# EAGLE board GarageDigitalClockDisplay (EAGLE 9.6.2)
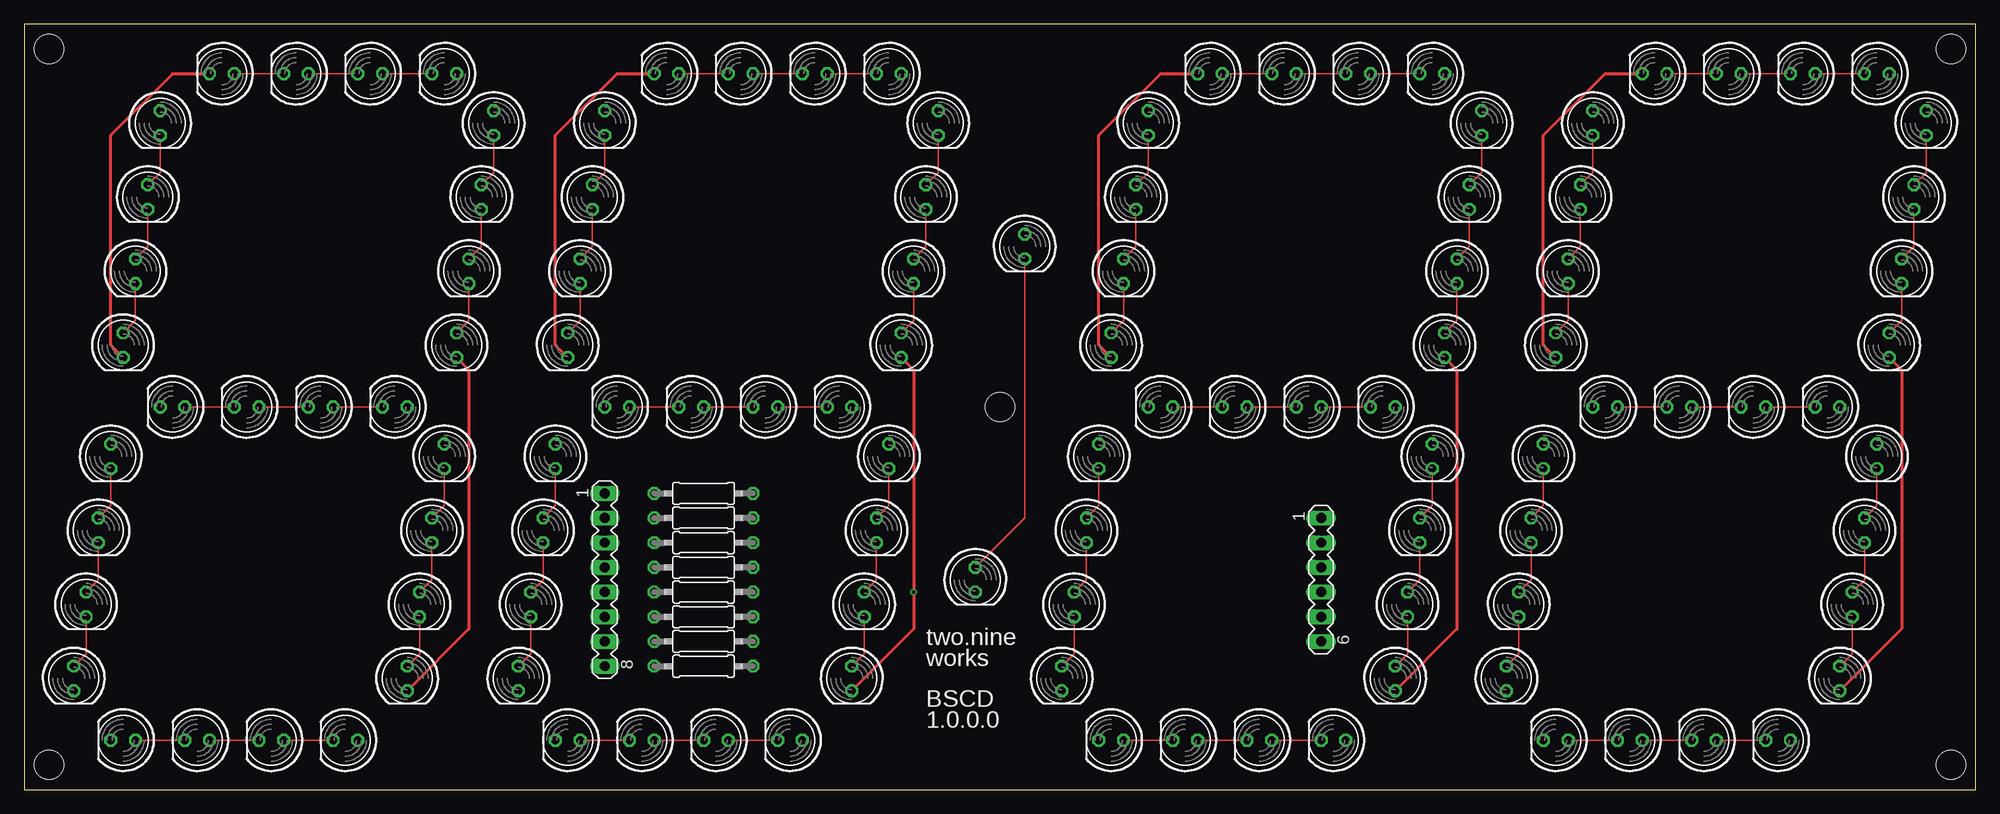
[diagram p0: board, top side]
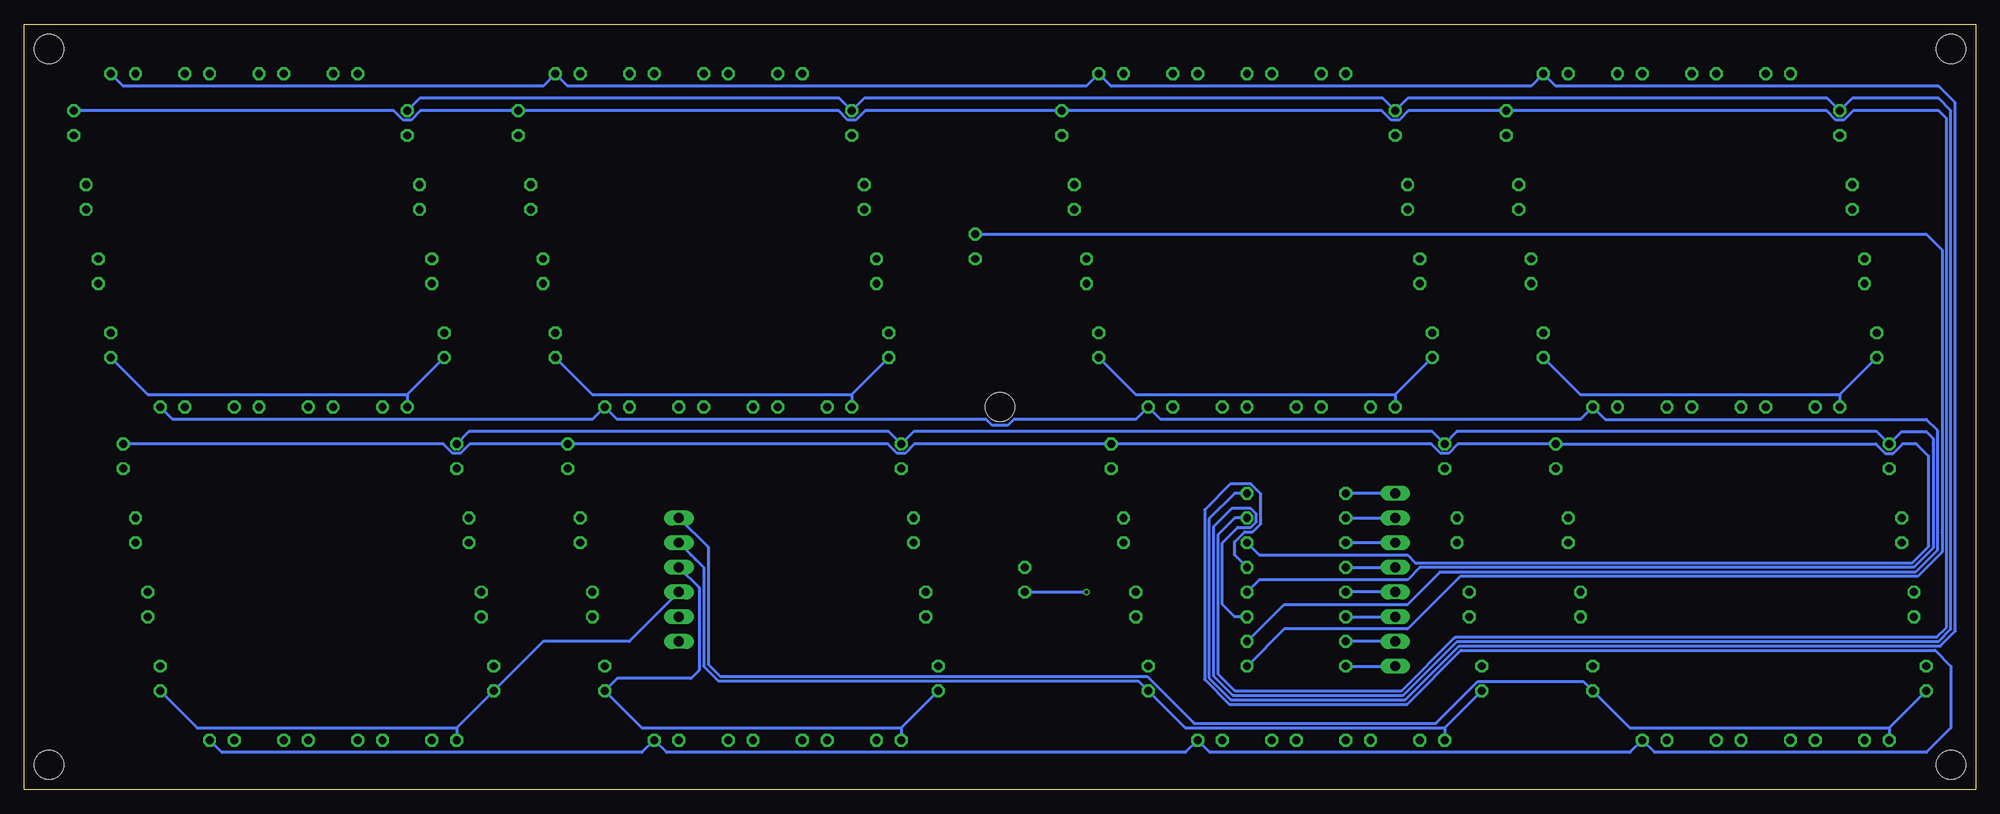
[diagram p1: board, bottom side, seen from below]

Size 200.66 x 78.74 mm. Coordinates in mm from the lower left corner, seen from the top.
Outline: 0,0 200.66,0 200.66,78.74 0,78.74 0,0
Copper layers (1*16): Top 0.035mm / dielectric 1.5mm / Bottom 0.035mm
Design rules "SeeedStudio_2layer_DRU_no_angle_20140221": minimum track width 6mil, minimum drill 12mil, track to track 6mil, track to pad 6mil, pad to pad 6mil, via to via 6mil, smd to smd 0mil, copper to edge 10mil, drill to drill 10mil, minimum pad ring 10mil, minimum via ring 6mil, stop-mask expansion 2mil, vias tented up to drill 100mil, thermal gap 10mil
Holes 3 mm at 2.54,76.2 2.54,2.54 198.12,76.2 198.12,2.54 100.33,39.37

## Footprints (pad centres in the part's own frame; a part is rotated, then mirrored left to right if it is on the bottom)
LED5MM = drill 0.813 octagon: A -1.27,0; K 1.27,0
0207/10 = drill 0.813 octagon: 1 -5.08,0; 2 5.08,0
MA08-1 = drill 1.016 long: 1 -8.89,0; 2 -6.35,0; 3 -3.81,0; 4 -1.27,0; 5 1.27,0; 6 3.81,0; 7 6.35,0; 8 8.89,0
MA06-1 = drill 1.016 long: 1 -6.35,0; 2 -3.81,0; 3 -1.27,0; 4 1.27,0; 5 3.81,0; 6 6.35,0

## Placement (x,y rotation side)
LED1  [LED5MM]  13.97,68.58 270 top
LED2  [LED5MM]  12.7,60.96 270 top
LED3  [LED5MM]  11.43,53.34 270 top
LED4  [LED5MM]  10.16,45.72 270 top
LED5  [LED5MM]  8.89,34.29 270 top
LED6  [LED5MM]  7.62,26.67 270 top
LED7  [LED5MM]  6.35,19.05 270 top
LED8  [LED5MM]  5.08,11.43 270 top
LED9  [LED5MM]  20.32,73.66 180 top
LED10  [LED5MM]  27.94,73.66 180 top
LED11  [LED5MM]  35.56,73.66 180 top
LED12  [LED5MM]  43.18,73.66 180 top
LED13  [LED5MM]  15.24,39.37 180 top
LED14  [LED5MM]  22.86,39.37 180 top
LED15  [LED5MM]  30.48,39.37 180 top
LED16  [LED5MM]  38.1,39.37 180 top
LED17  [LED5MM]  10.16,5.08 180 top
LED18  [LED5MM]  17.78,5.08 180 top
LED19  [LED5MM]  25.4,5.08 180 top
LED20  [LED5MM]  33.02,5.08 180 top
LED21  [LED5MM]  48.26,68.58 270 top
LED22  [LED5MM]  46.99,60.96 270 top
LED23  [LED5MM]  45.72,53.34 270 top
LED24  [LED5MM]  44.45,45.72 270 top
LED25  [LED5MM]  43.18,34.29 270 top
LED26  [LED5MM]  41.91,26.67 270 top
LED27  [LED5MM]  40.64,19.05 270 top
LED28  [LED5MM]  39.37,11.43 270 top
LED29  [LED5MM]  59.69,68.58 270 top
LED30  [LED5MM]  58.42,60.96 270 top
LED31  [LED5MM]  57.15,53.34 270 top
LED32  [LED5MM]  55.88,45.72 270 top
LED33  [LED5MM]  54.61,34.29 270 top
LED34  [LED5MM]  53.34,26.67 270 top
LED35  [LED5MM]  52.07,19.05 270 top
LED36  [LED5MM]  50.8,11.43 270 top
LED37  [LED5MM]  66.04,73.66 180 top
LED38  [LED5MM]  73.66,73.66 180 top
LED39  [LED5MM]  81.28,73.66 180 top
LED40  [LED5MM]  88.9,73.66 180 top
LED41  [LED5MM]  60.96,39.37 180 top
LED42  [LED5MM]  68.58,39.37 180 top
LED43  [LED5MM]  76.2,39.37 180 top
LED44  [LED5MM]  83.82,39.37 180 top
LED45  [LED5MM]  55.88,5.08 180 top
LED46  [LED5MM]  63.5,5.08 180 top
LED47  [LED5MM]  71.12,5.08 180 top
LED48  [LED5MM]  78.74,5.08 180 top
LED49  [LED5MM]  93.98,68.58 270 top
LED50  [LED5MM]  92.71,60.96 270 top
LED51  [LED5MM]  91.44,53.34 270 top
LED52  [LED5MM]  90.17,45.72 270 top
LED53  [LED5MM]  88.9,34.29 270 top
LED54  [LED5MM]  87.63,26.67 270 top
LED55  [LED5MM]  86.36,19.05 270 top
LED56  [LED5MM]  85.09,11.43 270 top
LED57  [LED5MM]  102.87,55.88 270 top
LED58  [LED5MM]  97.79,21.59 270 top
LED59  [LED5MM]  115.57,68.58 270 top
LED60  [LED5MM]  114.3,60.96 270 top
LED61  [LED5MM]  113.03,53.34 270 top
LED62  [LED5MM]  111.76,45.72 270 top
LED63  [LED5MM]  110.49,34.29 270 top
LED64  [LED5MM]  109.22,26.67 270 top
LED65  [LED5MM]  107.95,19.05 270 top
LED66  [LED5MM]  106.68,11.43 270 top
LED67  [LED5MM]  121.92,73.66 180 top
LED68  [LED5MM]  129.54,73.66 180 top
LED69  [LED5MM]  137.16,73.66 180 top
LED70  [LED5MM]  144.78,73.66 180 top
LED71  [LED5MM]  116.84,39.37 180 top
LED72  [LED5MM]  124.46,39.37 180 top
LED73  [LED5MM]  132.08,39.37 180 top
LED74  [LED5MM]  139.7,39.37 180 top
LED75  [LED5MM]  111.76,5.08 180 top
LED76  [LED5MM]  119.38,5.08 180 top
LED77  [LED5MM]  127,5.08 180 top
LED78  [LED5MM]  134.62,5.08 180 top
LED79  [LED5MM]  149.86,68.58 270 top
LED80  [LED5MM]  148.59,60.96 270 top
LED81  [LED5MM]  147.32,53.34 270 top
LED82  [LED5MM]  146.05,45.72 270 top
LED83  [LED5MM]  144.78,34.29 270 top
LED84  [LED5MM]  143.51,26.67 270 top
LED85  [LED5MM]  142.24,19.05 270 top
LED86  [LED5MM]  140.97,11.43 270 top
LED87  [LED5MM]  161.29,68.58 270 top
LED88  [LED5MM]  160.02,60.96 270 top
LED89  [LED5MM]  158.75,53.34 270 top
LED90  [LED5MM]  157.48,45.72 270 top
LED91  [LED5MM]  156.21,34.29 270 top
LED92  [LED5MM]  154.94,26.67 270 top
LED93  [LED5MM]  153.67,19.05 270 top
LED94  [LED5MM]  152.4,11.43 270 top
LED95  [LED5MM]  167.64,73.66 180 top
LED96  [LED5MM]  175.26,73.66 180 top
LED97  [LED5MM]  182.88,73.66 180 top
LED98  [LED5MM]  190.5,73.66 180 top
LED99  [LED5MM]  162.56,39.37 180 top
LED100  [LED5MM]  170.18,39.37 180 top
LED101  [LED5MM]  177.8,39.37 180 top
LED102  [LED5MM]  185.42,39.37 180 top
LED103  [LED5MM]  157.48,5.08 180 top
LED104  [LED5MM]  165.1,5.08 180 top
LED105  [LED5MM]  172.72,5.08 180 top
LED106  [LED5MM]  180.34,5.08 180 top
LED107  [LED5MM]  195.58,68.58 270 top
LED108  [LED5MM]  194.31,60.96 270 top
LED109  [LED5MM]  193.04,53.34 270 top
LED110  [LED5MM]  191.77,45.72 270 top
LED111  [LED5MM]  190.5,34.29 270 top
LED112  [LED5MM]  189.23,26.67 270 top
LED113  [LED5MM]  187.96,19.05 270 top
LED114  [LED5MM]  186.69,11.43 270 top
R1  120  [0207/10]  69.85,30.48 0 top
R2  120  [0207/10]  69.85,27.94 0 top
R3  120  [0207/10]  69.85,25.4 0 top
R4  120  [0207/10]  69.85,22.86 0 top
R5  120  [0207/10]  69.85,20.32 0 top
R6  120  [0207/10]  69.85,17.78 0 top
R7  120  [0207/10]  69.85,15.24 0 top
R8  360  [0207/10]  69.85,12.7 0 top
SV1  [MA08-1]  59.69,21.59 270 top
SV2  [MA06-1]  133.35,21.59 270 top

## Library data of the parts
LED1-LED114 = led
R1-R8 = rcl; SPICEPREFIX: R
SV1 SV2 = con-lstb; OC_FARNELL: unknown; OC_NEWARK: unknown

## Nets
N$1: LED1.K LED2.A
N$2: LED2.K LED3.A
N$3: LED3.K LED4.A
N$4: LED5.K LED6.A
N$5: LED6.K LED7.A
N$6: LED7.K LED8.A
N$7: LED9.A LED10.K
N$8: LED10.A LED11.K
N$9: LED11.A LED12.K
N$10: LED13.A LED14.K
N$11: LED14.A LED15.K
N$12: LED15.A LED16.K
N$13: LED17.A LED18.K
N$14: LED18.A LED19.K
N$15: LED19.A LED20.K
N$16: LED21.K LED22.A
N$17: LED22.K LED23.A
N$18: LED23.K LED24.A
N$19: LED25.K LED26.A
N$20: LED26.K LED27.A
N$21: LED27.K LED28.A
N$22: R1.1 SV1.1
N$23: LED1.A LED29.A LED59.A LED87.A R6.2
N$24: LED5.A LED33.A LED63.A LED91.A R5.2
N$25: LED20.A LED48.A LED78.A LED106.A R4.2
N$26: R2.1 SV1.2
N$27: LED21.A LED49.A LED79.A LED107.A R2.2
N$28: R3.1 SV1.3
N$29: LED4.K LED8.K LED9.K LED13.K LED17.K LED24.K LED28.K SV2.1
N$30: LED29.K LED30.A
N$31: LED30.K LED31.A
N$32: LED31.K LED32.A
N$33: LED33.K LED34.A
N$34: LED34.K LED35.A
N$35: LED35.K LED36.A
N$36: LED37.A LED38.K
N$37: LED38.A LED39.K
N$38: LED39.A LED40.K
N$39: LED41.A LED42.K
N$40: LED42.A LED43.K
N$41: LED43.A LED44.K
N$42: LED45.A LED46.K
N$43: LED46.A LED47.K
N$44: LED47.A LED48.K
N$45: LED49.K LED50.A
N$46: LED50.K LED51.A
N$47: LED51.K LED52.A
N$48: LED53.K LED54.A
N$49: LED54.K LED55.A
N$50: LED55.K LED56.A
N$51: R4.1 SV1.4
N$52: R5.1 SV1.5
N$53: R6.1 SV1.6
N$54: R7.1 SV1.7
N$55: R8.1 SV1.8
N$58: LED32.K LED36.K LED37.K LED41.K LED45.K LED52.K LED56.K LED58.K SV2.2
N$59: LED57.K LED58.A
N$60: LED57.A R8.2
N$61: LED59.K LED60.A
N$62: LED60.K LED61.A
N$63: LED61.K LED62.A
N$64: LED63.K LED64.A
N$65: LED64.K LED65.A
N$66: LED65.K LED66.A
N$67: LED67.A LED68.K
N$68: LED68.A LED69.K
N$69: LED69.A LED70.K
N$70: LED71.A LED72.K
N$71: LED72.A LED73.K
N$72: LED73.A LED74.K
N$73: LED75.A LED76.K
N$74: LED76.A LED77.K
N$75: LED77.A LED78.K
N$76: LED79.K LED80.A
N$77: LED80.K LED81.A
N$78: LED81.K LED82.A
N$79: LED83.K LED84.A
N$80: LED84.K LED85.A
N$81: LED85.K LED86.A
N$89: LED62.K LED66.K LED67.K LED71.K LED75.K LED82.K LED86.K SV2.3
N$90: LED87.K LED88.A
N$91: LED88.K LED89.A
N$92: LED89.K LED90.A
N$93: LED91.K LED92.A
N$94: LED92.K LED93.A
N$95: LED93.K LED94.A
N$96: LED95.A LED96.K
N$97: LED96.A LED97.K
N$98: LED97.A LED98.K
N$99: LED99.A LED100.K
N$100: LED100.A LED101.K
N$101: LED101.A LED102.K
N$102: LED103.A LED104.K
N$103: LED104.A LED105.K
N$104: LED105.A LED106.K
N$105: LED107.K LED108.A
N$106: LED108.K LED109.A
N$107: LED109.K LED110.A
N$108: LED111.K LED112.A
N$109: LED112.K LED113.A
N$110: LED113.K LED114.A
N$111: LED16.A LED44.A LED74.A LED102.A R7.2
N$115: LED25.A LED53.A LED83.A LED111.A R3.2
N$117: LED12.A LED40.A LED70.A LED98.A R1.2
N$118: LED90.K LED94.K LED95.K LED99.K LED103.K LED110.K LED114.K SV2.4

## Tracks (layer width: path | path; a pad name or v marks a point on that pad's centre or on a via)
N$1
  Top 0.152: LED1.K 13.97,63.5 LED2.A
N$2
  Top 0.152: LED2.K 12.7,55.88 LED3.A
N$3
  Top 0.152: LED3.K 11.43,48.26 LED4.A
N$4
  Top 0.152: LED5.K 8.89,29.21 LED6.A
N$5
  Top 0.152: LED6.K 7.62,21.59 LED7.A
N$6
  Top 0.152: LED7.K 6.35,13.97 LED8.A
N$7
  Top 0.152: LED9.A LED10.K
N$8
  Top 0.152: LED10.A LED11.K
N$9
  Top 0.152: LED11.A LED12.K
N$10
  Top 0.152: LED14.K LED13.A
N$11
  Top 0.152: LED15.K LED14.A
N$12
  Top 0.152: LED16.K LED15.A
N$13
  Top 0.152: LED17.A LED18.K
N$14
  Top 0.152: LED18.A LED19.K
N$15
  Top 0.152: LED19.A LED20.K
N$16
  Top 0.152: LED21.K 48.26,63.5 LED22.A
N$17
  Top 0.152: LED22.K 46.99,55.88 LED23.A
N$18
  Top 0.152: LED23.K 45.72,48.26 LED24.A
N$19
  Top 0.152: LED25.K 43.18,29.21 LED26.A
N$20
  Top 0.152: LED26.K 41.91,21.59 LED27.A
N$21
  Top 0.152: LED27.K 40.64,13.97 LED28.A
N$22
  Bottom 0.305: SV1.1 R1.1
N$23
  Bottom 0.305: LED87.A 160.02,71.12 116.84,71.12 LED59.A 114.3,71.12 60.96,71.12 LED29.A 58.42,71.12 15.24,71.12 LED1.A 12.7,71.12 3.81,71.12 2.54,69.85 2.54,16.51 3.81,15.24 53.32,15.24 58.85,9.7 76.39,9.7 78.38,11.7 78.38,27.03 76.5,28.91 74.53,28.91 73.97,28.34 73.97,27.54 74.53,26.98 75.89,26.98 77.47,25.4 77.47,19.05 76.2,17.78 R6.2
N$24
  Bottom 0.305: LED91.A 154.94,36.83 111.76,36.83 LED63.A 109.22,36.83 55.88,36.83 LED33.A 53.34,36.83 10.16,36.83 LED5.A 7.62,36.83 5.08,36.83 4.37,36.12 4.37,35.56 4.37,34.8 4.37,24.84 6.35,22.86 57.15,22.86 58.42,21.59 73.66,21.59 R5.2
N$25
  Bottom 0.305: LED106.A 180.34,3.81 137.16,3.81 LED78.A 134.62,3.81 81.28,3.81 LED48.A 78.74,3.81 35.56,3.81 LED20.A 33.02,3.81 5.08,3.81 2.54,6.35 2.54,12.7 4.17,14.33 52.94,14.33 58.48,8.79 76.77,8.79 79.3,11.32 79.3,28.79 76.64,31.45 74.53,31.45 73.51,30.42 73.51,27.35 74.34,26.52 75.18,26.52 76.2,25.5 76.2,24.13 R4.2
N$26
  Bottom 0.305: R2.1 SV1.2
N$27
  Bottom 0.305: LED107.A 162.66,69.85 161.69,68.89 160.89,68.89 159.93,69.85 LED79.A 116.94,69.85 115.97,68.89 115.17,68.89 114.2,69.85 LED49.A 61.05,69.85 60.09,68.89 59.29,68.89 58.33,69.85 LED21.A 15.34,69.85 14.37,68.89 13.57,68.89 12.61,69.85 3.81,69.85 3,69.04 3,16.7 4,15.7 53.51,15.7 53.61,15.6 53.65,15.55 59.04,10.16 76.2,10.16 77.93,11.89 77.93,26.21 76.2,27.94 R2.2
N$28
  Bottom 0.305: SV1.3 R3.1
N$29
  Top 0.305: LED24.K 45.72,43.18 45.72,16.51 LED28.K | LED4.K 8.89,45.72 8.89,67.31 15.24,73.66 LED9.K
  Bottom 0.305: LED4.K 13.97,40.64 | 13.97,40.64 LED13.K | LED24.K 40.64,40.64 13.97,40.64 | LED8.K 8.89,6.35 | 8.89,6.35 LED17.K | 8.89,6.35 35.56,6.35 LED28.K 40.34,11.12 51.2,11.12 55.52,6.81 80.37,6.81 85.2,11.63 129.1,11.63 130.35,12.89 130.35,24.94 SV2.1
N$30
  Top 0.152: LED29.K 59.69,63.5 LED30.A
N$31
  Top 0.152: LED30.K 58.42,55.88 LED31.A
N$32
  Top 0.152: LED31.K 57.15,48.26 LED32.A
N$33
  Top 0.152: LED33.K 54.61,29.21 LED34.A
N$34
  Top 0.152: LED34.K 53.34,21.59 LED35.A
N$35
  Top 0.152: LED35.K 52.07,13.97 LED36.A
N$36
  Top 0.152: LED37.A LED38.K
N$37
  Top 0.152: LED38.A LED39.K
N$38
  Top 0.152: LED39.A LED40.K
N$39
  Top 0.152: LED41.A LED42.K
N$40
  Top 0.152: LED42.A LED43.K
N$41
  Top 0.152: LED43.A LED44.K
N$42
  Top 0.152: LED45.A LED46.K
N$43
  Top 0.152: LED46.A LED47.K
N$44
  Top 0.152: LED47.A LED48.K
N$45
  Top 0.152: LED49.K 93.98,63.5 LED50.A
N$46
  Top 0.152: LED50.K 92.71,55.88 LED51.A
N$47
  Top 0.152: LED51.K 91.44,48.26 LED52.A
N$48
  Top 0.152: LED53.K 88.9,29.21 LED54.A
N$49
  Top 0.152: LED54.K 87.63,21.59 LED55.A
N$50
  Top 0.152: LED55.K 86.36,13.97 LED56.A
N$51
  Bottom 0.305: R4.1 SV1.4
N$52
  Bottom 0.305: SV1.5 R5.1
N$53
  Bottom 0.305: R6.1 SV1.6
N$54
  Bottom 0.305: SV1.7 R7.1
N$55
  Bottom 0.305: R8.1 SV1.8
N$58  (via drill 0.35)
  Top 0.305: LED52.K 91.44,43.18 v91.44,20.32 91.44,16.51 LED56.K | LED32.K 54.61,45.72 54.61,67.31 60.96,73.66 LED37.K
  Bottom 0.305: LED32.K 59.69,40.64 | 59.69,40.64 LED41.K | LED52.K 86.36,40.64 59.69,40.64 | LED36.K 54.61,6.35 | 54.61,6.35 LED45.K | 54.61,6.35 81.28,6.35 LED56.K 86.11,11.18 129.29,11.18 130.81,12.7 130.81,22.86 131.62,23.67 132.08,24.13 SV2.2 | LED58.K v91.44,20.32
N$59
  Top 0.152: LED57.K 102.87,27.94 LED58.A
N$60
  Bottom 0.305: LED57.A 5.08,57.15 3.45,55.52 3.45,26.67 3.45,26.42 3.45,24.46 5.97,21.95 52.98,21.95 58.42,16.51 71.12,16.51 R8.2
N$61
  Top 0.152: LED59.K 115.57,63.5 LED60.A
N$62
  Top 0.152: LED60.K 114.3,55.88 LED61.A
N$63
  Top 0.152: LED61.K 113.03,48.26 LED62.A
N$64
  Top 0.152: LED63.K 110.49,29.21 LED64.A
N$65
  Top 0.152: LED64.K 109.22,21.59 LED65.A
N$66
  Top 0.152: LED65.K 107.95,13.97 LED66.A
N$67
  Top 0.152: LED67.A LED68.K
N$68
  Top 0.152: LED68.A LED69.K
N$69
  Top 0.152: LED69.A LED70.K
N$70
  Top 0.152: LED72.K LED71.A
N$71
  Top 0.152: LED73.K LED72.A
N$72
  Top 0.152: LED74.K LED73.A
N$73
  Top 0.152: LED75.A LED76.K
N$74
  Top 0.152: LED76.A LED77.K
N$75
  Top 0.152: LED77.A LED78.K
N$76
  Top 0.152: LED79.K 149.86,63.5 LED80.A
N$77
  Top 0.152: LED80.K 148.59,55.88 LED81.A
N$78
  Top 0.152: LED81.K 147.32,48.26 LED82.A
N$79
  Top 0.152: LED83.K 144.78,29.21 LED84.A
N$80
  Top 0.152: LED84.K 143.51,21.59 LED85.A
N$81
  Top 0.152: LED85.K 142.24,13.97 LED86.A
N$89
  Top 0.305: LED82.K 147.32,43.18 147.32,16.51 LED86.K | LED62.K 110.49,45.72 110.49,67.31 116.84,73.66 LED67.K
  Bottom 0.305: LED62.K 115.57,40.64 | 115.57,40.64 LED71.K | LED82.K 142.24,40.64 115.57,40.64 | LED66.K 110.49,6.35 | 110.49,6.35 LED75.K | 110.49,6.35 137.16,6.35 LED86.K 139.7,11.43 132.08,11.43 131.27,12.24 131.27,20.78 SV2.3
N$90
  Top 0.152: LED87.K 161.29,63.5 LED88.A
N$91
  Top 0.152: LED88.K 160.02,55.88 LED89.A
N$92
  Top 0.152: LED89.K 158.75,48.26 LED90.A
N$93
  Top 0.152: LED91.K 156.21,29.21 LED92.A
N$94
  Top 0.152: LED92.K 154.94,21.59 LED93.A
N$95
  Top 0.152: LED93.K 153.67,13.97 LED94.A
N$96
  Top 0.152: LED95.A LED96.K
N$97
  Top 0.152: LED96.A LED97.K
N$98
  Top 0.152: LED97.A LED98.K
N$99
  Top 0.152: LED99.A LED100.K
N$100
  Top 0.152: LED100.A LED101.K
N$101
  Top 0.152: LED101.A LED102.K
N$102
  Top 0.152: LED103.A LED104.K
N$103
  Top 0.152: LED104.A LED105.K
N$104
  Top 0.152: LED105.A LED106.K
N$105
  Top 0.152: LED107.K 195.58,63.5 LED108.A
N$106
  Top 0.152: LED108.K 194.31,55.88 LED109.A
N$107
  Top 0.152: LED109.K 193.04,48.26 LED110.A
N$108
  Top 0.152: LED111.K 190.5,29.21 LED112.A
N$109
  Top 0.152: LED112.K 189.23,21.59 LED113.A
N$110
  Top 0.152: LED113.K 187.96,13.97 LED114.A
N$111
  Bottom 0.305: LED102.A 185.42,38.1 142.24,38.1 LED74.A 139.7,38.1 101.76,38.1 101.12,37.46 99.54,37.46 98.9,38.1 86.36,38.1 LED44.A 83.82,38.1 40.64,38.1 LED16.A 38.1,38.1 5.08,38.1 3.91,36.93 3.91,24.65 6.16,22.4 55.07,22.4 58.42,19.05 71.12,19.05 R7.2
N$115
  Bottom 0.305: LED111.A 157.57,35.56 156.61,34.59 155.81,34.59 154.84,35.56 LED83.A 111.86,35.56 110.89,34.59 110.09,34.59 109.12,35.56 LED53.A 55.98,35.56 55.01,34.59 54.21,34.59 53.24,35.56 LED25.A 10.26,35.56 9.29,34.59 8.49,34.59 7.53,35.56 6.1,35.56 4.83,34.29 4.83,25.03 6.54,23.32 57.61,23.32 58.42,24.13 73.66,24.13 R3.2
N$117
  Bottom 0.305: LED98.A 190.5,72.39 147.32,72.39 LED70.A 144.78,72.39 91.44,72.39 LED40.A 88.9,72.39 45.72,72.39 LED12.A 43.18,72.39 3.81,72.39 2.08,70.66 2.08,16.32 3.62,14.78 53.13,14.78 58.66,9.25 76.58,9.25 78.84,11.51 78.84,27.84 76.2,30.48 R1.2
N$118
  Top 0.305: LED110.K 193.04,43.18 193.04,16.51 LED114.K | LED90.K 156.21,45.72 156.21,67.31 162.56,73.66 LED95.K
  Bottom 0.305: 156.21,6.35 LED94.K 147.32,15.24 138.43,15.24 SV2.4 | 156.21,6.35 LED103.K | LED114.K 182.88,6.35 156.21,6.35 | LED90.K 161.29,40.64 | 161.29,40.64 LED99.K | LED110.K 187.96,40.64 161.29,40.64

## Text on the board
tPlace: two.nine / works | BSCD / 1.0.0.0